# Altium PCB roverSwitch.PcbDoc (part 2 of 3)
Units mm, origin at the board's own origin, x right, y up, seen from the top; angles counter-clockwise.
Board outline 100 x 80 mm, 4 copper layers (Top Layer, Int1 (GND), Int2 (PWR), Bottom Layer), stack 1.585 mm thick; 262 components, 196 nets, 913 pads, 409 vias.
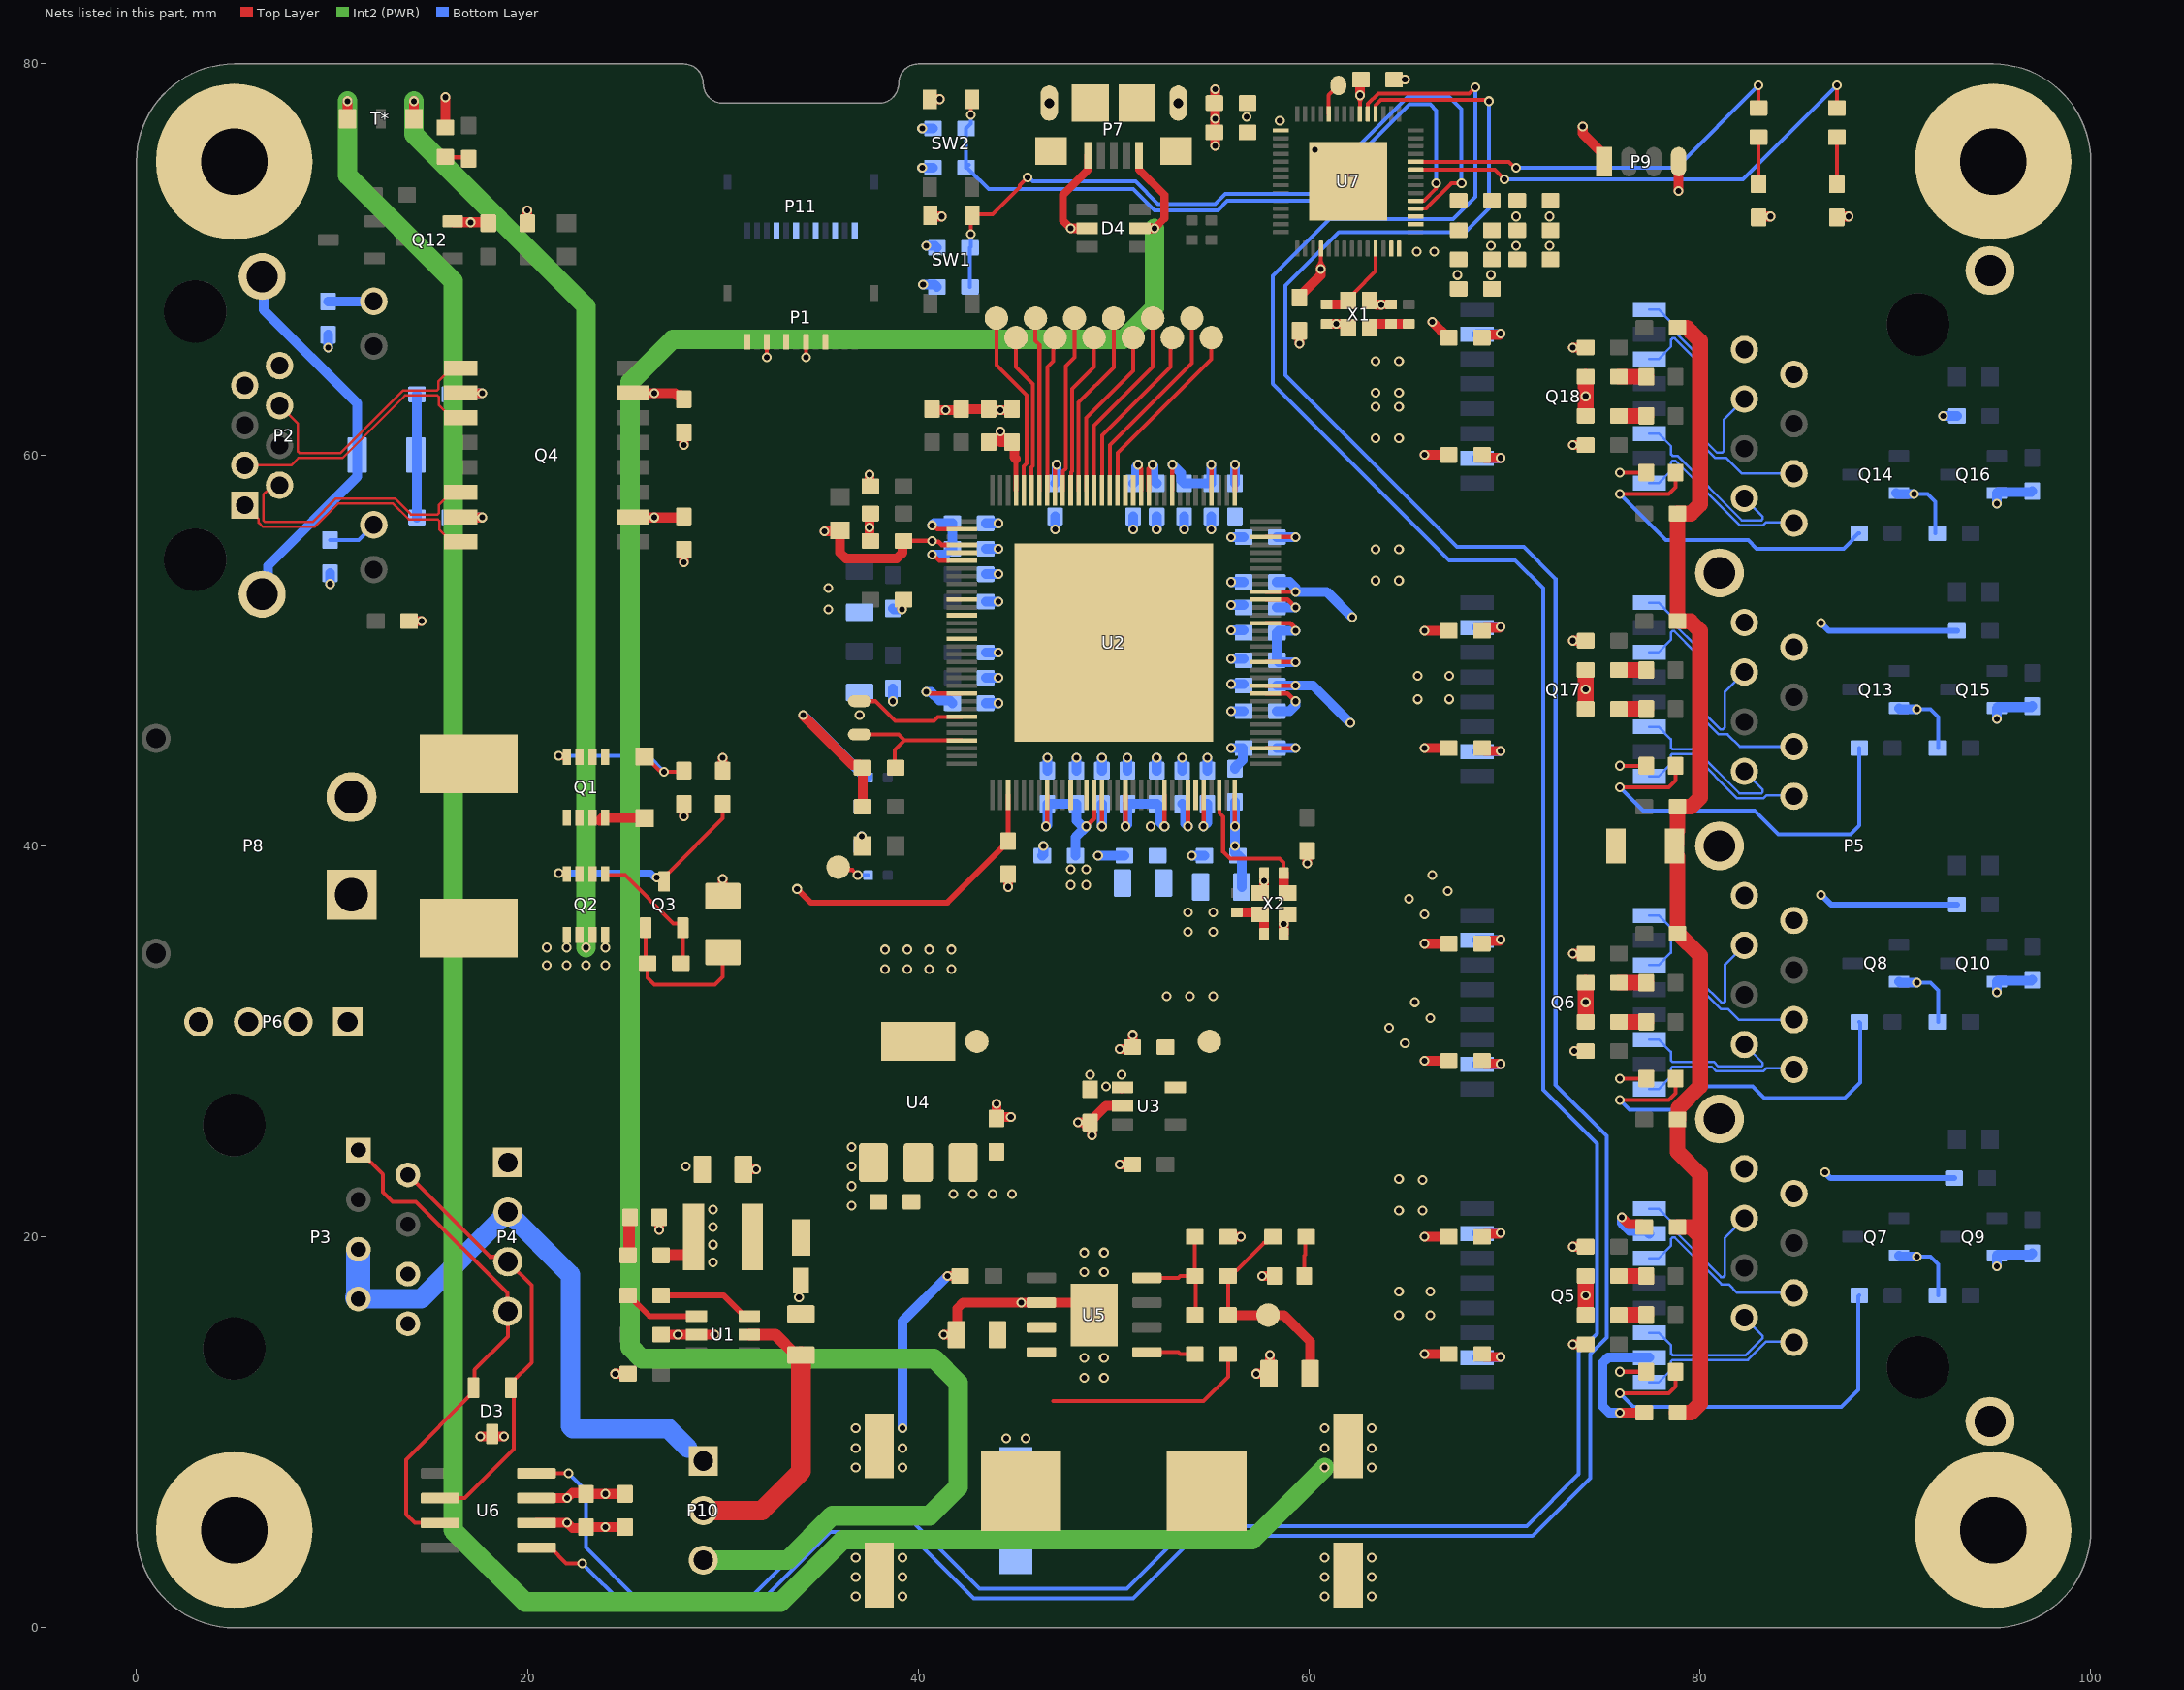
[diagram p4: the nets of this part, all layers, seen from the top]

## Part data
C1 C46: "10000 pF ±10% 25V Ceramic Capacitor X5R 0603 (1608 Metric)", Package / Case="Metric 1608 , EIA 0603", Supplier Part Number 1=478-KGM15AR51E103KTCT-ND, Volt=25V, Mounted=Yes, Precision=X5R-10%, Supplier 1=Digikey
C2: Package / Case="Metric 2012 , EIA 0805", Supplier Part Number 1=490-10515-1-ND, Volt=35V, Mounted=Yes, Precision=X5R-10%, Supplier 1=Digi-Key, Supplier 2=Digi-Key, Supplier 3=Digi-Key, Supplier 4=Digi-Key
C3: Package / Case="Metric 2012 , EIA 0805", Supplier Part Number 1=1276-6780-1-ND, Volt=16V, Mounted=Yes, Precision=X5R-10%, Supplier 1=Digi-Key, Supplier 2=Digi-Key, Supplier 3=Digi-Key, Supplier 4=Digi-Key
C4 C5 C7 C8 C9 C10 C11 C12 C13 C14 C15 C18 C19 C20 C21 C22 C23 C24 C25 C26 C27 C31 C32 C34 C36 C37 C41 C45 C48 C49 C50 C52 C53 C54 C55 C56 C57 C58 C59 C62 C63 C64 C65 C66 C67 C69 C70 C71 C72: Package / Case="Metric 1608, EIA 0603", Supplier Part Number 1=1276-1935-2-ND, Volt=50V, Mounted=Yes, Precision=X7R-10%, Supplier 1=Digi-Key, Supplier 2=Digi-Key, Supplier Part Number 2=1276-1934-2-ND
C6 C68: Package / Case="Metric 3216, EIA 1206", Supplier Part Number 1=399-C1206C102KGRAC7800CT-ND, Volt=2kV, Mounted=Yes, Precision=X7R-10%, Supplier 1=Digi-Key, Supplier 2=Digi-Key
C16 C28 C30 C60 C61: Package / Case="Metric 1608 , EIA 0603", Supplier Part Number 1=1276-1274-1-ND, Volt=10V, Mounted=Yes, Precision=20%, Supplier 1=Digikey
C17 C29 C74 C75 C85: "10 µF ±20% 10V Ceramic Capacitor X5R 0603 (1608 Metric)", Package / Case="Metric 1608 , EIA 0603", Supplier Part Number 1=4713-GMC10X5R106M10NTCT-ND, Volt=10V, Mounted=Yes, Precision=20%, Supplier 1=Digikey
C35 C42 C43 C44: Package / Case="0402 (1005 Metric)", Supplier Part Number 1=399-C0402C100K5GAC7867CT-ND, Volt=50V, HelpURL=https://connect.kemet.com:7667/gateway/IntelliData-ComponentDocumentation/1.0/download/datasheet/C0402C100K5GACTU, Mounted=Yes, Precision="C0G - 10%", Supplier 1=Digi-Key, Supplier 2=Digi-Key
C38 C40 C47 C51 C76 C77: Package / Case="Metric 1608, EIA 0603", Supplier Part Number 1=1276-1859-2-ND, Volt=25V, Mounted=Yes, Precision=X5R-10%, Supplier 1=Digi-Key, Supplier 2=Digi-Key, Supplier Part Number 2=1276-1942-2-ND
  C40: Supplier 3=Digi-Key, Supplier 4=Digi-Key
C39: "Capacitor-0603-10uF-6.3V-X5R, Low ESR, Low ESL", Package / Case="Metric 1608 , EIA 0603", Supplier Part Number 1=NMC0603X5R106M6.3TRP4KF, Volt=6.3V, Mounted=Yes, Precision=X5R-20%, Supplier 1="Arrow Electronics"
C78: Package / Case="Metric 1608 , EIA 0603", Supplier Part Number 1=490-4778-1-ND, Volt=50V, Mounted=Yes, Precision=X7R-10%, Supplier 1=Digikey
C79: library part Capacitor-100uF-50V-SMD, "CAP ALUM 100UF 20% 50V SMD", Supplier Part Number 1=1189-1651-1-ND, Volt=50V, Mounted=Yes, Precision=20%, Supplier 1=Digi-Key, Supplier 2=Digi-Key
C81 C83: Package / Case="Metric 2012 , EIA 0805", Supplier Part Number 1=490-12389-1-ND, Volt=25V, Mounted=Yes, Precision=X5R-20%, Supplier 1=Digi-Key, Supplier 2=Digi-Key
C82: Package / Case="Metric 1608, EIA 0603", Supplier Part Number 1=478-KGM15ACG1H820JTCT-ND, Volt=50V, Mounted=Yes, Precision=C0G-5%, Supplier 1=Digi-Key, Supplier 2=Digi-Key
C84: library part Capacitor-220uF-35V-SMD, Supplier Part Number 1=1189-1651-1-ND, Volt=35V, Mounted=Yes, Precision=20%, Supplier 1=Digi-Key, Supplier 2=Digi-Key
D1 D2: "Diode SCHOTTKY  30 V 100mA Surface Mount 0402/SOD-923F", Package / Case=0402/SOD-923F, Supplier Part Number 1=641-1271-1-ND, Volt=30, Mounted=Yes, Supplier 1=Digi-Key
D3: "55V Clamp 6A (8/20µs) Ipp Tvs Diode Surface Mount SOT-23", Package / Case=SOT-23-3, Supplier Part Number 1=5272-ESDCAN24-2BLYCT-ND, Volt=24, Mounted=Yes, Supplier 1=Digi-Key
D4: "4CH Clamp Ipp Tvs Diode Surface Mount SOT23-6 (SC74)", Package / Case=SOT23-6, Supplier Part Number 1=NUP4301MR6T1GOSTR-ND, Volt=70, Mounted=Yes, Supplier 1=Digi-Key
D5: "DIODE SCHOTTKY 40V 5A SMA", Package / Case=SMA, Supplier Part Number 1=641-1707-1-ND, Volt=40V, Mounted=Yes, Supplier 1=Digi-Key
DZ1: "Zener Diode 6.2 V 200 mW ±6% Surface Mount SOD-123", Package / Case=SOD-123, Supplier Part Number 1=BZT52C13-TPMSCT-ND, Volt=6.2V, Grade=None, Mounted=Yes, Precision=6%, Supplier 1=Digi-Key, Watt=200mW
DZ2: "Diode 30 V 1A Surface Mount MicroSMP (DO-219AD)", Package / Case="DO-214AC, SMA", Supplier Part Number 1=MSS1P3L-M3/89AGICT-ND, Volt=30V, Grade=None, Mounted=Yes, Supplier 1=Digi-Key
DZ3: "DIODE ZENER 27V 500MW SOD123", Package / Case=SOD-123, Supplier Part Number 1=MMSZ5254B-TPMSCT-ND, Volt=27V, Grade=None, Mounted=Yes, Precision=5%, Supplier 1=Digi-Key, Watt=0.5W
J1 J2 J3 J4 J5 J6 J7 J8 J9 J10 J11 J12 J13 J14 J15 J20 J21 J22 J23: library part "PAD 0.53mm AWG28-Solid", "PAD for 28 AWG Solid Wire", Mounted=N/A
J16 J17 J18 J19: library part "Hole 3.40mm M3-Eyelet", "Hole for M3 Bolt with 8mm pad", Mounted=N/A
L1: "10 µH Shielded Drum Core, Wirewound Inductor 1.5 A 100mOhm Nonstandard", Current=1.5A, Package / Case=SMD, Supplier Part Number 1=535-12314-2-ND, Mounted=Yes, Precision=20%, Supplier 1=Digi-Key
L2 L3 L5 L6: "180 Ohms @ 100 MHz 1 Power Line Ferrite Bead 0805 (2012 Metric) 4A 20mOhm", Current=4A, Package / Case=SMD, Supplier Part Number 1=4816-HFZ2012PF-181T40CT-ND, Mounted=Yes, Supplier 1=Digi-Key
L4: "60 Ohms @ 100 MHz 1 Signal Line Ferrite Bead 0603 (1608 Metric) 3A 40mOhm", Current=3A, Package / Case=SMD, Supplier Part Number 1=1934-1396-1-ND, Mounted=Yes, Supplier 1=Digi-Key
L7: "2 A 277 V AC 250 V DC Fuse Board Mount (Cartridge Style Excluded) Requires Holder, Surface Mount 2-SMD, Square End Block with Clip", Current=2A, Package / Case=SMD, Supplier Part Number 1=486-2091-ND, Mounted=Yes, Supplier 1=Digi-Key
L8: "FIXED IND 22UH 5A 66 MOHM SMD", Current=5A, Package / Case=SMD, Supplier Part Number 1=308-2498-1-ND, Mounted=Yes, Precision=20%, Supplier 1=Digi-Key
LED1 LED5 LED6 LED17: "LED RED CLEAR 1608 SMD", Package / Case="0603 (1608 Metric)", Supplier Part Number 1=3147-B1911USD-20D000114U1930CT-ND, Mounted=Yes, Supplier 1=Digi-Key
LED2 LED3 LED4 LED7 LED8 LED9 LED10 LED11 LED12 LED13 LED14 LED15 LED16: "LED RED CLEAR 0603 SMD", Package / Case="0603 (1608 Metric)", Supplier Part Number 1=3147-B1911USD-20D000114U1930CT-ND, Mounted=Yes, Supplier 1=Digi-Key
P1 P11: library part FFC-12P-0.5MM-R/A, "CONN FFC FPC 12POS 0.5MM R/A", Package / Case=SMD, Supplier Part Number 1=609-F3311A7H121012E200CT-ND, Volt=50V, Mounted=Yes, Supplier 1=Digi-Key
P2: "Jack Modular Connector 8p8c (RJ45, Ethernet) 90° Angle (Right) Shielded with LEDs", Package / Case=SMD, Supplier Part Number 1=2057-MTJ-88ARX1-FSM-LG-ND, Volt=N/A, HelpURL=https://app.adam-tech.com/products/download/data_sheet/203879/mtj-88arx1-fsm-lg-data-sheet.pdf, Mounted=Yes, Supplier 1=Digikey
P3: library part RJ545, "Jack Modular Connector 8p8c (RJ45, Ethernet) 90° Angle (Right) Unshielded Cat3", Package / Case=SMD, Supplier Part Number 1=609-1046-ND, Volt=N/A, HelpURL=https://cdn.amphenol-cs.com/media/wysiwyg/files/drawing/c-bmj-0102.pdf, Mounted=Yes, Supplier 1=Digikey
P4 P6: "4pos TH 2.54mm Header", Package / Case=TH, Supplier Part Number 1=N/A, Mounted=Yes, Supplier 1=Digi-Key, Volt=N/A
P5: library part RJ45-4Ports, "Jack Modular Connector 8p8c (RJ45, Ethernet) 90° Angle (Right) Shielded Cat5", Package / Case=TH, Supplier Part Number 1=151-1120-ND, Volt=N/A, HelpURL=https://mm.digikey.com/Volume0/opasdata/d220001/medias/docus/971/A00-432-262-450.pdf, Mounted=Yes, Supplier 1=Digikey
P7: library part USB-Micro, "USB - micro B USB 2.0 Receptacle Connector 5 Position Surface Mount, Right Angle; Through Hole", Package / Case=SMD, Supplier Part Number 1=609-4616-2-ND, Volt=N/A, Mounted=Yes, Supplier 1=Digikey
P8: library part XT30_pcb, Package / Case=TH, Volt=N/A, Mounted=Yes, Supplier 1=Digi-Key
P9: "4pos SMD 1.27mm", Package / Case=TH, Supplier Part Number 1=N/A, Mounted=Yes, Supplier 1=Digi-Key, Volt=N/A
P10: "3pos TH 2.54mm Header", Package / Case=TH, Supplier Part Number 1=N/A, Mounted=Yes, Supplier 1=Digi-Key, Volt=N/A
Q1 Q2: "MOSFET P-CH 30V 24A 8DFN", Current=24A, Package / Case="8-DFN-EP (3x3)", Supplier Part Number 1=785-1796-2-ND, Volt=30V, Mounted=Yes, Supplier 1=Digi-Key
Q3 Q7 Q8 Q11 Q13 Q14: "P-Channel 30 V 6A (Ta) 1W (Ta) Surface Mount SOT-23F", Current=6A, Package / Case=SOT-523, Supplier Part Number 1=SSM3J332RLFCT-ND, Volt=30V, Mounted=Yes, Supplier 1=Digi-Key
Q4 Q5 Q6 Q17 Q18: "350µH LAN 10/100 Base-T Pulse Transformer 1CT:1CT Surface Mount", Supplier Part Number 1=PT61017PELCT-ND, Mounted=Yes, Supplier 1=Digi-Key
Q9 Q10 Q12 Q15 Q16: "N-Channel 30 V 4A (Ta) 1.4W (Ta) Surface Mount SOT-23-3", Current=4A, Package / Case=SOT-23-3, Supplier Part Number 1=DMG3402L-7DICT-ND, Volt=30V, Mounted=Yes, Supplier 1=Digi-Key
R1 R6 R7 R38 R39 R51: library part Resistor0603-10k, "Resistor0603-10k", Package / Case="Metric 1608, EIA 0603", Supplier Part Number 1=311-10.0KHRTR-ND, Mounted=Yes, Precision=1%, Supplier 1=Digi-Key, Supplier 2=Digi-Key, Supplier 3=Digi-Key, Supplier 4=Digi-Key, Supplier Part Number 2=RMCF0603FT10K0TR-ND, Watt=0.1W
R2 R3 R33 R34 R35 R36 R45 R46 R47 R48: library part Resistor-0603-75R, "Resistor0603-75R", Package / Case="Metric 1608, EIA 0603", Supplier Part Number 1=311-75.0HRCT-ND, Mounted=Yes, Precision=1%, Supplier 1=Digi-Key, Watt=0.1W
R4 R5 R8 R27 R28 R29 R32 R37 R40 R41 R42 R43 R44 R75: library part Resistor-0603-1k, "Resistor0603-1k", Package / Case="Metric 1608, EIA 0603", Supplier Part Number 1=311-1.00KHRCT-ND, Mounted=Yes, Precision=1%, Supplier 1=Digi-Key, Watt=0.1W
R9 R10 R11 R12 R22 R23 R24 R52 R55 R56 R57 R58 R59 R60 R61 R62 R63 R64 R65 R66 R67 R68 R69 R70 R71 R72 R73 R74: library part Resistor-0603-10k, "Resistor0603-10k", Package / Case="Metric 1608, EIA 0603", Supplier Part Number 1=311-10.0KHRTR-ND, Mounted=Yes, Precision=1%, Supplier 1=Digi-Key, Watt=0.1W
R13 R14 R15 R16 R17 R19 R20 R21: library part Resistor-0603-750R, "Resistor0603-750R", Package / Case="Metric 1608, EIA 0603", Supplier Part Number 1=311-750HRCT-ND, Mounted=Yes, Precision=1%, Supplier 1=Digi-Key, Watt=0.1W
R18: library part Resistor-0603-191R, "Resistor-0603-191R", Package / Case="Metric 1608, EIA 0603", Supplier Part Number 1=311-191HRCT-ND, Mounted=Yes, Precision=1%, Supplier 1=Digi-Key, Watt=0.1W
R25: library part Resistor-0402-0R, "Resistor-0402-0R", Package / Case="Metric 1005, EIA 0402", Supplier Part Number 1=311-100LRCT-ND, Mounted=Yes, Precision=1%, Supplier 1=Digi-Key, Watt=1/16W
R26: library part Resistor-0603-6.04k, "Resistor-0603-6.04k", Package / Case="Metric 1608, EIA 0603", Supplier Part Number 1=311-6.04KHRCT-ND, Mounted=Yes, Precision=1%, Supplier 1=Digi-Key, Watt=0.1W
R49 R53: library part Resistor-0603-100k, "Resistor0603-100k", Package / Case="Metric 1608, EIA 0603", Supplier Part Number 1=311-100KHRCT-ND, Mounted=Yes, Precision=1%, Supplier 1=Digi-Key, Watt=0.1W
R50: library part Resistor-0603-32.4k, "Resistor0603-32.4k", Package / Case="Metric 1608, EIA 0603", Supplier Part Number 1=311-32.4KHRCT-ND, Mounted=Yes, Precision=1%, Supplier 1=Digi-Key, Watt=0.1W
R54: library part Resistor-0603-8.87k, "Resistor0603-8.87k", Package / Case="Metric 1608, EIA 0603", Supplier Part Number 1=311-8.87KHRCT-ND, Mounted=Yes, Precision=1%, Supplier 1=Digi-Key, Watt=0.1W
SW1 SW2: "TACT 4.2 X 3.2, 2.5 MM H, 180GF,", Current=0.05A, Supplier Part Number 1=CKN12215-1-ND, Volt=12V, Mounted=Yes, Supplier 1=Digi-Key
T2: library part NetTie_0603_Short
U1: library part REG_SWR_RT8258GJ6, "Switching Regulator/Controller", Manufacturer=Richtek, Supplier Part Number=835-RT8258GJ6, Category="Voltage Regulators - Switching", ComponentLink1Description=https://datasheet.ciiva.com:443/pdfs/VipMasterIC/IC/RHTK/RHTKS00677/RHTKS00677-1.pdf?src-supplier=IHS+Markit, ComponentLink1URL=https://datasheet.ciiva.com:443/pdfs/VipMasterIC/IC/RHTK/RHTKS00677/RHTKS00677-1.pdf?src-supplier=IHS+Markit, ComponentLink2Description=https://datasheet.ciiva.com/2035/3d3futf-83fb3frfm4mju4ltaylnbkzg3d3d3f3d-2035878.pdf?src-supplier=Digikey, ComponentLink2URL=https://datasheet.ciiva.com/2035/3d3futf-83fb3frfm4mju4ltaylnbkzg3d3d3f3d-2035878.pdf?src-supplier=Digikey, ComponentLink3Description=https://datasheet.ciiva.com/22686/1720507-22686356.pdf?src-supplier=Element14, ComponentLink3URL=https://datasheet.ciiva.com/22686/1720507-22686356.pdf?src-supplier=Element14, Manufacturer Part Number=RT8258GJ6, Pricing="1=0,64, 10=0,566, 50=0,566, 100=0,434, 1000=0,274, 10000=0,223 (USD)", RoHS=Yes, Stock=6840, Supplier=Mouser
U2: "IC ETHERNET SWITCH 7PORT 128TQFP", Package / Case=128TQFP, Supplier Part Number 1=KSZ8567STXI-CT-ND, HelpURL=https://ww1.microchip.com/downloads/aemDocuments/documents/OTH/ProductDocuments/DataSheets/KSZ8567S-Data-Sheet-DS00002391C.pdf, Mounted=Yes, Supplier 1=Digikey
U3: "IC REG 2.5V Positive Fixed 1 Output 1A SOT-23-5", Package / Case=SOT23-5, Supplier Part Number 1=296-50412-1-ND, Mounted=Yes, Supplier 1=Digi-Key
U4: "IC REG 1.2V LINEAR 1A SOT223", Package / Case=SOT223, Supplier Part Number 1=296-TLV1117LV12DCYRCT-ND, Mounted=Yes, Supplier 1=Digi-Key
U5: "5A Buck Switching Regulator IC Positive Adjustable 1.222V 1 Output 5A 8-SOIC (0.154\", 3.90mm Width) Exposed Pad", Package / Case=8-SOIC-EP, Supplier Part Number 1=1028-RT6285GSPCT-ND, Grade=None, HelpURL=file:///C:/Users/Emile/Downloads/DS6285-00.pdf, Mounted=Yes, Supplier 1=Digi-Key
U6: "1/1 Transceiver Half CANbus 8-SOIC", Package / Case=8-SOIC, Supplier Part Number 1=296-26344-1-ND, HelpURL=https://www.ti.com/lit/ds/symlink/sn65hvd230.pdf?HQS=dis-dk-null-digikeymode-dsf-pf-null-wwe&ts=1723930967656&ref_url=https%253A%252F%252Fwww.ti.com%252Fgeneral%252Fdocs%252Fsuppproductinfo.tsp%253FdistId%253D10%2526gotoUrl%253Dhttps%253A%252F%252Fwww.ti.com%252Flit%252Fgpn%252Fsn65hvd230, Mounted=Yes, Supplier 1=Digikey
U7: "IC RF TxRx + MCU Bluetooth, WiFi 802.11b/g/n, Bluetooth v5.0 2.412GHz ~ 2.484GHz 56-VFQFN Exposed Pad", Package="56-VFQFN Exposed Pad", Supplier Part Number 1=1965-ESP32-S3FN8-ND, Availability="In Stock", DigiKey Link=https://www.digikey.ca/en/products/detail/espressif-systems/ESP32-S3FN8/15822446, HelpURL=https://www.espressif.com/sites/default/files/documentation/esp32-s3_datasheet_en.pdf, MF="Espressif Systems", MP=ESP32-S3FN8, Supplier 1=Digikey
X1: "40 MHz ±10ppm Crystal 8pF 50 Ohms 4-SMD, No Lead", Supplier Part Number 1=478-CX2016DB40000D0FLJCCCT-ND, Supplier 1=Digikey
X2: "25 MHz ±30ppm Crystal 20pF 50 Ohms 4-SMD, No Lead", Supplier Part Number 1=FL2500123ZCT-ND, HelpURL=https://www.diodes.com/assets/Datasheets/FL.pdf, Supplier 1=Digikey

## Via types
v1: diameter 0.5, hole 0.3, Top Layer to Bottom Layer, tented both sides, 409 vias

## Nets (pads, with @x,y where several pads share a name; then routed paths per layer and width w, separated by ;. In a path a pad name is that pad's centre, name@x,y a point inside that pad or via, vN(x,y) a via of type N, cw(c..) or ccw(c..) an arc to the next point about the centre after c; other vN are vias at no path point)
1V2: C7.2 C8.2 C9.2 C10.2 C11.2 C12.2 C13.2 C14.2 C15.2 C16.2 C77.2 J21.1 L5.1 L6.1 U2.11 U2.23 U2.45 U2.56 U2.66 U2.70 U2.87 U2.104 U2.110 U4.2 U4.4 | length 36
  Top Layer w0.23: v1(40.417,47.875) 40.469,47.823 40.602,47.823 40.625,47.8 U2.87@42.221,47.8 ; v1@40.673,54.9 v1(40.7,54.9) 40.773,54.9 41.077,54.596 41.484,54.596 41.487,54.599 U2.70@41.555,54.599 ; v1(40.7,56.4) 40.773,56.4 40.973,56.2 U2.66@42.221,56.2 ; v1(46.525,41) 46.525,41.073 46.6,41.148 U2.104@46.6,42.621 ; U2.56@47,58.179 47,59.352 47.075,59.427 v1(47.075,59.5) ; v1(48.6,41) 49,41.4 U2.110@49,42.621 ; v1@51.251,59.476 51.251,59.449 51.4,59.3 U2.45@51.4,58.179 ; U2.11@57.779,48.2 v1(59.3,48.2) ; U2.23@57.779,53 v1(59.3,53)
  Bottom Layer w0.5: v1(40.417,47.875) 40.651,47.875 41.076,47.45 41.6,47.45 C14.2@41.75,47.3 ; v1(40.7,56.4) 40.8,56.5 C10.2@41.75,56.5 41.75,55.25 C11.2@41.7,55.2 ; v1@40.702,54.902 41.402,54.902 C11.2@41.7,55.2 ; C11.2@41.75,55.2 C11.2@41.7,55.2 ; v1(46.525,41) 46.6,41.075 C12.2@46.6,42.15 C13.2@48.1,42.15 48.1,41.3 48.4,41 v1(48.6,41) 48.05,40.45 C15.2@48.05,39.5 ; C9.2@47,58.55 47.075,58.625 v1(47.075,59.5) ; C8.2@51,58.55 51.15,58.7 51.15,59.399 v1(51.251,59.5) ; C16.2@58.35,48.2 v1(59.3,48.2) 60.2,48.2 v1(62.1,46.3) ; C7.2@58.35,53.5 59.007,53.5 59.3,53.207 v1(59.3,53) 60.9,53 v1(62.2,51.7)
  other v1: 38.3,33.7 39.433,33.7 40.567,33.7 41.7,33.7 38.3,34.7 39.433,34.7 40.567,34.7 41.7,34.7 47.8,38 48.6,38 47.8,38.8 48.6,38.8 37,46.7
2V5: C75.1 J20.1 L2.1 L3.1 U3.5
  other v1: 52.7,32.3 53.9,32.3 55.1,32.3 53.8,35.6 55.1,35.6 53.8,36.6 55.1,36.6 35.4,52.1 35.4,53.2
3V3: C3.2 C17.2 C18.2 C19.2 C20.2 C34.2 C37.2 C38.2 C39.2 C46.2 C47.2 C48.2 C49.2 C50.2 C51.2 C74.1 C76.2 C85.2 D1.2 L1.2 L4.2 P9.1 R4.2 R5.1 R8.1 R22.2 R23.2 R24.2 R27.2 R28.2 R29.2 R32.2 R37.2 R38.2 R39.2 R42.2 R43.2 R44.2 R49.2 R51.2 R55.2 R57.2 R63.2 R67.2 R69.2 T2.1 U2.61 U2.68 U2.99 U3.1 U4.3 U6.3 U7.20 U7.29 U7.46 U7.55 U7.56 | length 86.1
  Top Layer w0.2: 60.6,69.8 U7.46@60.6,70.555 ; U7.20@62.6,77.445 v1@62.6,78.2
  Top Layer w0.23: C19.2@39.25,55.6 39.251,55.601 v1(40.7,55.602) v1(40.7,55.602) 40.752,55.551 41.046,55.551 41.197,55.4 U2.68@41.555,55.4 ; C20.2@44.6,40.25 U2.99@44.6,42.621 ; U2.61@45,58.179 45,59.8
  Top Layer w0.3: v1@33.816,37.806 33.816,37.784 33.9,37.7 34.5,37.1 41.493,37.1 44.343,39.95 44.35,39.95 44.6,40.2 C20.2@44.6,40.25 ; v1@60.6,69.7 60.6,69.8 ; v1@62.6,78.2 v1(62.6,78.4)
  Top Layer w0.35: v1@60.6,69.6 v1@60.6,69.7
  Top Layer w0.5: R63.2@20,71.85 v1(20,72.5) ; U6.3@20.464,6.635 v1(22.035,6.635) 22.3,6.9 22.95,6.9 C85.2@23,6.85 C34.2@25,6.85 ; v1(24.5,13) R49.2@25.15,13 ; v1(34.1,46.7) 34.1,46.68 36.63,44.15 37,44.15 R22.2@37.15,44 R24.2@37.15,42 ; v1(35.2,56.1) T2.1@35.95,56.1 ; T2.1@36,56.1 36,55 36.3,54.7 38.9,54.7 39.2,55 39.2,55.55 C19.2@39.25,55.6 ; v1(44.2,61.2) 44.2,60.65 C18.2@44.8,60.65 44.8,60.563 44.913,60.45 44.913,59.887 45,59.8 ; C74.1@48.85,27.65 C74.1@48.9,27.6 ; v1(50.3,23.7) R51.2@50.95,23.7 ; U3.1@50.408,27.608 U3.1@50.45,27.65 ; C49.2@59.4,68 60.317,68.917 60.6,69.2 v1@60.6,69.6 ; v1(62.6,78.4) C48.2@62.6,79.2 ; v1(74,76.8) 74,76.445 75.095,75.35 P9.1@75.095,75
  Top Layer w0.6: R4.2@26.85,19.055 28.055,19.055 L1.2@28.1,19.1
  Top Layer w0.8: R28.2@74.15,16 R27.2@74.15,18 ; R32.2@74.15,31 R29.2@74.15,33 ; R42.2@74.15,47 R37.2@74.15,49 ; R43.2@74.15,62 R44.2@74.15,64
  Bottom Layer w0.3: v1(86.2,37.5) 86.7,37 R57.2@93.15,37 ; v1(86.2,51.4) 86.6,51 R67.2@93.15,51 ; v1@86.4,23.273 86.403,23.273 86.676,23 R55.2@93,23
  Bottom Layer w0.5: v1(9.8,65.5) R8.1@9.8,66.15 ; v1(9.9,53.4) R5.1@9.9,53.95 ; v1(34.1,46.7) 37.3,43.5 D1.2@37.4,43.5 ; R23.2@37.15,42 37.15,43.35 ; D1.2@37.35,43.55 D1.2@37.4,43.6 ; v1(40.2,76.7) R39.2@40.75,76.7 ; v1(40.4,70.7) 40.85,70.7 R38.2@40.95,70.6 ; v1(92.45,62) R69.2@93.15,62
  other v1: 24,6.85 74.15,17 29.5,18.7 29.5,19.6 29.5,20.5 29.5,21.4 41.8,22.2 42.8,22.2 43.8,22.2 44.8,22.2 86.4,23.3 28.1,23.6 49.6,27.7 48.8,28.3 50.4,28.3 74.15,32 33.8,37.8 74.15,48 74.15,63 67.6,69.2 60.6,69.5 65.5,70.4 66.4,70.4 70.6,70.7 70.6,72.2 58.5,77.1 56.8,77.3
5V_USB: D4.5 P7.1 P10.3 | length 124.5
  Top Layer w0.4: P7.1@51.3,75.325 51.3,74.6 52.6,73.3 52.6,72.1 v1(52.1,71.6)
  Top Layer w0.5: D4.5@51.35,71.6 v1(52.1,71.6)
  Int2 (PWR) w1: P10.3@29,3.46 33.315,3.46 35.59,5.735 40.575,5.735 42.04,7.199 42.04,12.543 40.81,13.773 25.844,13.773 25.259,14.358 25.259,63.73 27.439,65.911 50.496,65.911 52.095,67.509 v1@52.095,71.595
12V: C82.2 C83.2 C84.1 J22.1 L8.2 Q7.2 Q8.2 Q13.2 Q14.2 R53.2 R56.2 R58.2 R68.2 R70.2 R75.2 T*.1 | length 151.9
  Top Layer w0.2: C82.2@55.7,17.9 55.85,17.75 R53.2@55.85,16 ; C82.2@55.85,18 56.15,18.3 56.308,18.3 57.708,19.7 57.85,19.7 R75.2@58.15,20
  Top Layer w0.5: T*.1@10.8,77.4 v1(10.8,78.1) ; R53.2@55.7,16 R53.2@55.85,16 J22.1@57.9,16 58.7,16 60.05,14.65 C83.2@60.05,13
  Int2 (PWR) w1: v1(10.8,78.1) 10.8,74.3 16.2,68.9 16.2,5 19.878,1.322 32.968,1.322 36.152,4.506 57.102,4.506 v1(60.8,8.204)
  Bottom Layer w0.2: v1(90.95,58) 91.65,58 92.05,57.6 R70.2@92.05,56 ; v1(91.1,19) 91.8,19 92.2,18.6 R56.2@92.2,17 ; v1(91.1,33) 91.8,33 92.2,32.6 R58.2@92.2,31 ; v1(91.1,47) 91.8,47 92.2,46.6 R68.2@92.2,45
  Bottom Layer w0.5: Q14.2@90.035,58.05 90.085,58 v1(90.95,58) ; Q7.2@90.185,19.05 90.235,19 v1(91.1,19) ; Q8.2@90.185,33.05 90.235,33 v1(91.1,33) ; Q13.2@90.185,47.05 90.235,47 v1(91.1,47)
  other v1: 63.2,8.204 60.8,9.204 63.2,9.204 60.8,10.204 63.2,10.204
24V: C79.1 C81.2 P3.5 P3.7 P4.2 P10.1 Q2.5 Q2.6 Q2.7 Q2.8 R52.2 T*.2 U5.7 | length 89.2
  Top Layer w0.5: T*.2@14.2,77.1 T*.2@14.2,77.2 v1(14.2,78.1) ; v1(41.5,18) R52.2@42.15,18
  Int2 (PWR) w1: v1(14.2,78.1) 14.2,76.4 23,67.6 v1(23,34.8)
  Bottom Layer w0.2: 22.2,10.317 22.317,10.2 ; 28.21,9.19 28.35,9.19 28.917,8.623 P10.1@28.917,8.483
  Bottom Layer w0.5: v1(39.2,10.204) 39.2,15.7 v1(41.5,18)
  Bottom Layer w1: P3.7@11.35,16.825 14.555,16.825 P4.2@19,21.27 22.2,18.07 22.2,10.317 ; 22.317,10.2 27.2,10.2 28.21,9.19
  Bottom Layer w1.25: P3.7@11.3,16.9 11.347,16.947 11.347,19.362 P3.5@11.35,19.365
  other v1: 36.8,8.204 39.2,8.204 36.8,9.204 39.2,9.204 36.8,10.204 21,33.9 22,33.9 23,33.9 24,33.9 21,34.8 22,34.8 24,34.8
24V_RAW: L7.1 P6.3 P6.4 P8.P
AVDDH: C21.2 C22.2 C23.2 C24.2 C25.2 C26.2 C27.2 C28.2 L2.2 U2.10 U2.22 U2.33 U2.44 U2.111 U2.122 U2.128 | length 21.9
  Top Layer w0.23: v1@49.4,40.9 U2.111@49.4,42.621 ; v1(53.8,41) U2.122@53.8,42.621 ; v1@56.2,41.2 U2.128@56.2,42.621 ; U2.10@57.779,47.8 58.9,47.8 v1(59.3,47.4) ; U2.22@57.779,52.6 58.9,52.6 v1(59.3,52.2)
  Top Layer w0.25: U2.44@51.8,58.179 51.8,59.3 v1(52,59.5) ; v1@53.8,40.9 v1(53.8,41) ; U2.33@56.2,58.179 v1@56.2,59.3 ; v1@59.3,47.388 v1(59.3,47.4)
  Bottom Layer w0.5: v1(49.4,41) C23.2@49.4,42.15 ; v1(52,59.5) 52.05,59.45 52.05,58.7 C24.2@52.2,58.55 ; C22.2@53.5,42.15 53.65,42 53.65,41.15 v1(53.8,41) ; C21.2@56.2,42.25 v1(56.2,41) 56.2,39.65 C28.2@56.35,39.5 56.4,39.5 56.55,39.35 L2.2@56.55,37.9 ; C25.2@56.2,58.55 v1(56.2,59.5) ; C27.2@58.35,46.9 59.007,46.9 59.3,47.193 v1(59.3,47.4) ; C26.2@58.35,52.2 v1(59.3,52.2)
  other v1: 56.2,40
AVDDL: C45.2 C52.2 C53.2 C54.2 C55.2 C56.2 C57.2 C58.2 C59.2 C60.2 L5.2 U2.3 U2.14 U2.19 U2.30 U2.36 U2.41 U2.114 U2.119 U2.124 | length 27.3
  Top Layer w0.23: v1(50.6,41) U2.114@50.6,42.621 ; v1(52.6,41) U2.119@52.6,42.621 ; U2.41@53,58.179 v1@53,59.3 ; v1@54.6,40.9 U2.124@54.6,42.621 ; U2.36@55,58.179 v1@55,59.4 ; U2.3@57.779,45 v1@59.2,45 ; U2.14@57.779,49.4 v1@59.2,49.4 ; U2.19@57.779,51.4 59.049,51.4 59.248,51.201 59.248,51.052 v1(59.3,51) ; U2.30@57.779,55.8 v1@59.1,55.8
  Bottom Layer w0.5: v1(50.6,41) 50.7,41.1 C56.2@50.7,42.15 C57.2@52.2,42.15 52.35,42 52.35,41.25 v1(52.6,41) ; v1(53,59.5) 53.3,59.2 53.307,59.2 53.45,59.057 53.45,58.7 C55.2@53.6,58.55 C54.2@55,58.55 v1(55,59.5) ; v1(54.6,41) 54.8,41.2 C58.2@54.8,42.15 ; C60.2@58.35,45 v1(59.3,45) ; C53.2@58.35,55.8 v1(59.3,55.8) ; v1(59.3,49.4) 58.45,49.4 C45.2@58.35,49.5 C52.2@58.35,50.9 58.45,51 v1(59.3,51)
  other v1: 51.9,41
CAN_H: D3.2 P3.1 P4.4 U6.7 | length 26.1
  Top Layer w0.2: P3.1@11.35,24.445 12.6,23.195 12.6,22.3 13.1,21.8 14.3,21.8 18.977,17.123 18.977,16.423 P4.4@19.1,16.3 ; U6.7@15.536,5.365 14.235,5.365 13.8,5.8 13.8,8.61 17.2,12.01 D3.2@17.2,12.2 ; D3.2@17.3,12.56 17.3,13.2 19,14.9 P4.4@19,16.19
CAN_L: D3.1 P3.2 P4.3 U6.6 | length 22.4
  Top Layer w0.2: P3.2@13.89,23.175 18.086,18.979 18.721,18.979 P4.3@19,18.7 ; U6.6@15.536,6.635 16.8,6.635 19.3,9.135 19.3,12.135 D3.1@19.15,12.285 ; P4.3@19,18.73 20.212,17.518 20.212,13.572 19.2,12.56 D3.1@19.2,12.2
CAN_RX: U6.4 U7.19 | length 157.7
  Top Layer w0.2: U6.4@20.3,7.9 20.303,7.903 22.097,7.903 v1(22.1,7.9) ; U7.19@63,77.445 63.01,77.455 63.01,77.96 63.542,78.492 68.192,78.492 v1(68.5,78.8)
  Bottom Layer w0.2: v1(22.1,7.9) 23,7 23,4.102 25.512,1.59 31.465,1.59 35.259,5.384 39.756,5.384 43.132,2.008 50.676,2.008 53.881,5.213 71.138,5.213 73.793,7.868 73.793,14.111 74.741,15.059 74.741,24.759 71.982,27.518 71.982,53.179 70.548,54.613 67.179,54.613 58.15,63.643 58.15,69.167 61.038,72.055 67.358,72.055 68.5,73.198 v1(68.5,78.8)
CAN_TX: U6.1 U7.18 | length 154.7
  Top Layer w0.2: U6.1@20.5,4.1 21.183,4.1 21.983,3.3 v1(22.8,3.3) ; U7.18@63.4,77.445 63.41,77.455 63.41,77.9 63.666,78.156 69.144,78.156 v1(69.2,78.1)
  Bottom Layer w0.2: v1(22.8,3.3) 25,1.1 31.7,1.1 35.5,4.9 39.449,4.9 42.849,1.5 51,1.5 54.2,4.7 71.422,4.7 74.379,7.657 74.379,14.003 75.218,14.842 75.218,25.168 72.612,27.774 72.612,53.668 70.98,55.3 67.569,55.3 58.784,64.085 58.784,68.655 61.526,71.397 67.997,71.397 69.2,72.6 v1(69.2,78.1)
EN: C40.2 R38.1 SW1.1 U7.4 | length 39.3
  Top Layer w0.2: v1(42.7,71.3) 42.7,72.175 SW1.1@42.775,72.25 ; SW1.1@42.8,72.3 43.8,72.3 45.19,73.69 45.19,73.79 v1(45.6,74.2) ; U7.4@65.445,72.6 65.455,72.61 65.99,72.61 67.28,73.9 v1(67.8,73.9)
  Bottom Layer w0.2: C40.2@42.65,68.6 R38.1@42.65,70.55 ; R38.1@42.65,70.6 42.7,70.65 v1(42.7,71.3) ; v1(45.6,74.2) 45.667,74.2 45.867,74 51.113,74 52.269,72.843 55.2,72.843 55.7,73.344 60.056,73.344 65.059,78.347 67.153,78.347 67.8,77.7 v1(67.8,73.9)
ETH_RX_1_N: P5.A6 Q5.9 | length 8.8
  Bottom Layer w0.125: Q5.9@77.407,21.445 77.877,21.445 78.516,20.806 78.516,20.513 81.081,17.948 81.185,17.948 81.258,18.021 81.258,19.938 P5.A6@82.27,20.95
ETH_RX_1_P: P5.A3 Q5.11 | length 9.2
  Bottom Layer w0.125: Q5.11@77.407,18.905 77.877,18.905 78.523,19.552 78.523,19.897 78.597,19.971 78.701,19.971 81.103,17.568 81.472,17.568 81.9,17.14 P5.A3@84.81,17.14
ETH_RX_2_N: P5.B6 Q6.9 | length 9.8
  Bottom Layer w0.125: Q6.9@77.407,36.445 77.877,36.445 80.048,34.274 80.048,33.036 81.102,31.982 81.206,31.982 81.279,32.055 81.279,33.929 P5.B6@82.27,34.92
ETH_RX_2_P: P5.B3 Q6.11 | length 10.8
  Bottom Layer w0.125: Q6.11@77.407,33.905 77.877,33.905 78.509,34.537 78.509,35.205 78.582,35.279 78.686,35.279 79.796,34.169 79.796,32.931 81.082,31.645 81.445,31.645 81.98,31.11 P5.B3@84.81,31.11
ETH_RX_3_N: P5.C6 Q17.9 | length 11.8
  Bottom Layer w0.125: Q17.9@77.407,52.445 77.877,52.445 78.513,51.809 78.513,51.516 80.048,49.981 80.048,46.964 81.054,45.958 81.158,45.958 81.271,46.071 81.271,47.891 P5.C6@82.27,48.89
ETH_RX_3_P: P5.C3 Q17.11 | length 12.3
  Bottom Layer w0.125: Q17.11@77.407,49.905 77.877,49.905 78.509,50.538 78.509,50.911 78.583,50.985 78.687,50.985 79.796,49.876 79.796,46.86 80.95,45.706 81.414,45.706 82.04,45.08 P5.C3@84.81,45.08
ETH_RX_4_N: P5.D6 Q18.9 | length 12.5
  Bottom Layer w0.125: Q18.9@77.407,67.445 77.877,67.445 78.51,66.812 78.51,66.519 80.048,64.981 80.048,60.934 80.869,60.113 81.14,60.113 81.213,60.186 81.213,61.803 P5.D6@82.27,62.86
ETH_RX_4_P: P5.D3 Q18.11 | length 13.3
  Bottom Layer w0.125: Q18.11@77.407,64.905 77.877,64.905 78.523,65.551 78.523,65.898 78.597,65.971 78.701,65.971 79.796,64.876 79.796,60.83 80.765,59.86 81.329,59.86 82.139,59.05 P5.D3@84.81,59.05
ETH_RX_5_N: P2.6 Q4.9 | length 13.1
  Top Layer w0.125: P2.6@7.32,62.53 8.262,61.588 8.262,60.173 8.336,60.1 10.443,60.1 13.644,63.301 15.384,63.301 15.457,63.375 15.457,63.779 16.123,64.445 Q4.9@16.593,64.445
ETH_RX_5_P: P2.3 Q4.11 | length 13.3
  Top Layer w0.125: P2.3@5.54,59.47 7.914,59.47 8.291,59.847 10.547,59.847 13.749,63.049 15.393,63.049 15.467,62.975 15.467,62.561 16.123,61.905 Q4.11@16.593,61.905
ETH_TX_1_N: P5.A2 Q5.14 | length 8.3
  Bottom Layer w0.125: Q5.14@77.407,15.095 77.877,15.095 78.518,14.454 78.518,14.025 78.591,13.951 82.341,13.951 83.213,14.823 83.213,14.927 P5.A2@82.27,15.87
ETH_TX_1_P: P5.A1 Q5.16 | length 8.5
  Bottom Layer w0.125: Q5.16@77.407,12.555 77.877,12.555 78.514,13.192 78.514,13.625 78.588,13.699 82.445,13.699 83.391,14.645 84.765,14.645 P5.A1@84.81,14.6
ETH_TX_2_N: P5.B2 Q6.14 | length 8.1
  Bottom Layer w0.125: Q6.14@77.407,30.095 77.877,30.095 78.512,29.459 78.512,29.025 78.586,28.951 80.707,28.951 80.939,28.72 83.139,28.72 83.213,28.793 83.213,28.897 P5.B2@82.27,29.84
ETH_TX_2_P: P5.B1 Q6.16 | length 8.3
  Bottom Layer w0.125: Q6.16@77.407,27.555 77.877,27.555 78.512,28.191 78.512,28.625 78.586,28.699 80.603,28.699 80.834,28.467 83.244,28.467 83.391,28.615 84.765,28.615 P5.B1@84.81,28.57
ETH_TX_3_N: P5.C2 Q17.14 | length 8.9
  Bottom Layer w0.125: Q17.14@77.407,46.095 77.877,46.095 78.509,45.462 78.509,45.025 78.583,44.951 79.749,44.951 82.01,42.69 83.139,42.69 83.213,42.763 83.213,42.867 P5.C2@82.27,43.81
ETH_TX_3_P: P5.C1 Q17.16 | length 9.1
  Bottom Layer w0.125: Q17.16@77.407,43.555 77.877,43.555 78.509,44.188 78.509,44.625 78.583,44.699 79.644,44.699 81.906,42.437 83.244,42.437 83.391,42.585 84.765,42.585 P5.C1@84.81,42.54
ETH_TX_4_N: P5.D2 Q18.14 | length 9.4
  Bottom Layer w0.125: Q18.14@77.407,61.095 77.877,61.095 78.526,60.446 78.526,60.025 78.599,59.951 78.845,59.951 82.136,56.66 83.139,56.66 83.213,56.733 83.213,56.837 P5.D2@82.27,57.78
ETH_TX_4_P: P5.D1 Q18.16 | length 9.6
  Bottom Layer w0.125: Q18.16@77.407,58.555 77.877,58.555 78.514,59.192 78.514,59.625 78.587,59.699 78.74,59.699 82.032,56.407 83.244,56.407 83.391,56.555 84.765,56.555 P5.D1@84.81,56.51
ETH_TX_5_N: P2.2 Q4.14 | length 14
  Top Layer w0.125: P2.2@7.32,58.45 6.973,58.45 6.609,58.087 6.59,58.087 6.502,57.998 6.502,56.643 6.575,56.569 9.009,56.569 10.208,57.768 13.227,57.768 14.045,56.951 15.41,56.951 15.483,57.025 15.483,57.455 16.123,58.095 Q4.14@16.593,58.095
ETH_TX_5_P: P2.1 Q4.16 | length 13.2
  Top Layer w0.125: P2.1@5.54,57.43 6.249,56.721 6.249,56.538 6.471,56.317 9.114,56.317 10.313,57.516 13.123,57.516 13.94,56.699 15.415,56.699 15.489,56.625 15.489,56.19 16.123,55.555 Q4.16@16.593,55.555
GND: C2.1 C3.1 C4.1 C5.1 C7.1 C8.1 C9.1 C10.1 C11.1 C12.1 C13.1 C14.1 C15.1 C16.1 C17.1 C18.1 C19.1 C20.1 C21.1 C22.1 C23.1 C24.1 C25.1 C26.1 C27.1 C28.1 C29.1 C30.1 C31.1 C32.1 C34.1 C35.1 C36.1 C37.1 C38.1 C39.1 C40.1 C41.1 C42.1 C43.1 C44.1 C45.1 C46.1 C47.1 C48.1 C49.1 C50.1 C51.1 C52.1 C53.1 C54.1 C55.1 C56.1 C57.1 C58.1 C59.1 C60.1 C61.1 C62.1 C63.1 C64.1 C65.1 C66.1 C67.1 C68.2 C69.1 C70.1 C71.1 C72.1 C74.2 C75.2 C76.1 C77.1 C79.2 C81.1 C83.1 C84.2 C85.1 D3.3 D4.2 D5.1 DZ2.2 DZ3.1 J16.1 J17.1 J18.1 J19.1 LED1.1 LED12.1 LED13.1 LED14.1 LED15.1 LED16.1 LED17.1 P1.4 P1.6 P1.8 P1.10 P1.12 P2.7 P2.8 P3.6 P3.8 P4.1 P5.A7 P5.A8 P5.B7 P5.B8 P5.C7 P5.C8 P5.D7 P5.D8 P5.Shield P6.1 P6.2 P7.5 P7.S1 P7.S2 P7.S3 P7.S4 P7.S5 P7.S6 P8.N P9.4 P11.4 P11.6 P11.8 P11.10 P11.12 Q9.2 Q10.2 Q12.2 Q15.2 Q16.2 R6.1 R7.1 R9.1 R10.1 R11.1 R12.1 R13.1 R14.1 R15.1 R16.1 R17.1 R18.1 R19.1 R20.1 R21.1 R26.1 R40.1 R41.1 R50.1 R54.1 R61.1 R62.1 R66.1 R73.1 R74.1 SW1.3 SW2.3 T3.2 U1.2 U2.46 U2.47 U2.69 U2.75 U2.77 U2.80 U2.107 U2.109 U2.123 U2.EPAD U3.2 U4.1 U5.6 U5.9 U6.2 U7.57 X1.2 X1.4 X2.2 X2.4 | length 114.3
  Top Layer w0.2: v1@32.25,64.95 P1.10@32.25,65.78 ; v1@34.25,64.95 P1.6@34.25,65.78 ; v1(75.9,13.1) LED12.1@77.25,13.1 ; v1(75.9,28.1) LED13.1@77.25,28.1 ; v1(75.9,44.1) LED15.1@77.25,44.1 ; v1(75.9,59.1) LED16.1@77.25,59.1
  Top Layer w0.4: v1(47.8,71.6) 47.408,71.992 47.408,73.308 48.7,74.6 P7.5@48.7,75.325
  Top Layer w0.5: R21.1@13.95,51.5 v1(14.6,51.5) ; LED14.1@15.8,76.75 v1(15.8,78.3) ; Q12.2@16.185,71.95 16.235,71.9 17.95,71.9 R66.1@18,71.85 ; v1(17.6,9.8) 18.15,9.8 D3.3@18.2,9.85 ; D3.3@18.2,9.915 D3.3@18.2,9.85 ; v1(18.8,9.8) 18.25,9.8 D3.3@18.2,9.85 ; U6.2@20.464,5.365 v1(22.035,5.365) 22.3,5.1 22.95,5.1 C85.1@23,5.15 C34.1@25,5.15 ; v1(26.75,20.35) LED1.1@26.75,21 ; R50.1@26.9,15 v1(27.7,15) U1.2@28.65,15 v1(29.6,15) ; v1(28,41.5) R6.1@28,42.15 ; v1(28,54.5) C5.1@28,55.15 ; v1(28,60.5) C4.1@28,61.15 ; DZ3.1@30,37.43 v1(30,38.3) ; R7.1@30,43.85 v1(30,44.5) ; C3.1@31.05,23.455 v1(31.7,23.455) ; C19.1@37.5,55.8 37.5,56.95 R12.1@37.55,57 ; v1(37.5,59) 37.5,58.45 R11.1@37.55,58.4 ; v1(39.175,52.1) 39.175,52.525 R18.1@39.25,52.6 ; SW2.3@40.6,78.2 v1(41.1,78.2) ; SW1.3@40.625,72.25 40.675,72.2 v1(41.2,72.2) ; R10.1@40.7,62.35 40.75,62.3 42.15,62.3 R9.1@42.2,62.35 C17.1@43.6,62.35 43.65,62.3 v1(44.2,62.3) 44.75,62.3 C18.1@44.8,62.35 ; v1(41.3,15) C81.1@41.95,15 ; C81.1@42,15.4 42,16.342 42.299,16.641 46.294,16.641 U5.6@46.3,16.635 48.05,16.635 48.1,16.685 U5.9@48.1,16.7 ; C76.1@44,26.15 v1(44,26.8) ; C76.1@44.086,26.135 v1(44.736,26.135) ; v1(44.6,37.9) C20.1@44.6,38.55 ; v1(47.8,71.6) D4.2@48.65,71.6 ; v1(48.164,25.865) C74.2@48.6,25.865 ; C74.2@48.6,25.7 49.6,26.7 U3.2@50.45,26.7 ; v1(48.9,25.2) C74.2@48.9,25.85 ; v1(50.3,29.6) C75.2@50.95,29.6 ; C75.2@50.965,29.686 v1(50.965,30.336) ; C51.1@55.15,76.5 55.2,76.55 C50.1@55.2,77.9 ; C50.1@55.15,77.9 55.2,77.95 v1(55.2,78.7) ; v1(55.2,75.8) C51.1@55.2,76.5 ; R54.1@55.85,20 v1(56.5,20) ; v1(57.3,13) C83.1@57.95,13 ; v1(57.6,18) LED17.1@58.25,18 ; X2.4@57.7,37.6 57.7,38.426 C35.1@57.7,38.6 ; C83.1@58,13.3 v1(58,13.95) ; C44.1@58.7,35.5 X2.2@58.7,36.5 ; v1(59.5,65.7) C49.1@59.5,66.35 ; v1(59.9,39.1) R26.1@59.9,39.75 ; C43.1@60.9,66.7 X1.4@61.9,66.7 ; X1.2@63.1,67.7 63.436,67.7 63.45,67.686 v1(63.7,67.686) ; v1@63.7,67.7 C42.1@64.2,67.7 ; C48.1@64.35,79.2 v1(64.9,79.2) ; v1(65.9,14) C67.1@67.15,14 ; v1(65.9,20) C66.1@67.15,20 ; v1(65.9,29) C65.1@67.15,29 ; v1(65.9,35) C64.1@67.15,35 ; v1(65.9,45) C72.1@67.15,45 ; v1(65.9,51) C71.1@67.15,51 ; v1(65.9,60) C70.1@67.15,60 ; v1(66.3,66.8) 67.1,66 C69.1@67.15,66 ; v1(73.5,14.5) R13.1@74.15,14.5 ; v1(73.5,19.5) R14.1@74.15,19.5 ; v1(73.5,34.5) R16.1@74.15,34.5 ; v1(73.5,50.5) R17.1@74.15,50.5 ; v1(73.5,60.5) R20.1@74.15,60.5 ; v1(73.5,65.5) R19.1@74.15,65.5 ; v1(73.572,29.5) R15.1@74.15,29.5 ; v1(78.9,73.5) 78.905,73.505 P9.4@78.905,75 ; R40.1@83,72.15 83.05,72.2 v1(83.6,72.2) ; R41.1@87,72.15 87.05,72.2 v1(87.6,72.2)
  Bottom Layer w0.5: v1(37.1,40.5) 37.1,40.05 C29.1@37.15,40 ; v1(38.7,47.4) C63.1@38.7,48.05 ; C32.1@38.7,52.15 38.75,52.1 v1(39.175,52.1) ; v1(40.2,74.7) C41.1@40.75,74.7 ; v1(40.248,68.712) 40.838,68.712 C40.1@40.95,68.6 ; C14.1@43.45,47.3 v1(44.1,47.3) ; C62.1@43.45,48.6 v1(44.1,48.6) ; C31.1@43.45,49.9 v1(44.1,49.9) ; C30.1@43.45,52.5 v1(44.1,52.5) ; C61.1@43.45,53.9 v1(44.1,53.9) ; C11.1@43.45,55.2 v1(44.1,55.2) ; C10.1@43.45,56.5 v1(44.1,56.5) ; C15.1@46.35,39.5 46.4,39.55 v1(46.4,40) ; C12.1@46.6,43.85 v1(46.6,44.5) ; v1(47,56.2) C9.1@47,56.85 ; C13.1@48.1,43.85 v1(48.1,44.5) ; v1(49.2,39.5) C59.1@50.55,39.5 ; C23.1@49.4,43.85 v1(49.4,44.5) ; C56.1@50.7,43.85 v1(50.7,44.5) ; v1(51,56.2) C8.1@51,56.85 ; C57.1@52.2,43.85 v1(52.2,44.5) ; v1(52.2,56.2) C24.1@52.2,56.85 ; C22.1@53.5,43.85 v1(53.5,44.5) ; v1(53.6,56.2) C55.1@53.6,56.85 ; v1(54,39.5) C28.1@54.65,39.5 ; C58.1@54.8,43.85 v1(54.8,44.5) ; v1(55,56.2) C54.1@55,56.85 ; v1(56,45) C60.1@56.6,45 ; v1(56,46.9) C27.1@56.65,46.9 ; v1(56,48.28) C16.1@56.65,48.28 ; v1(56,49.56) C45.1@56.65,49.56 ; v1(56,51.04) C52.1@56.65,51.04 ; v1(56,52.32) C26.1@56.65,52.32 ; v1(56,53.5) C7.1@56.65,53.5 ; v1(56,55.8) C53.1@56.65,55.8 ; C21.1@56.2,43.95 56.2,44 56.6,44.4 C60.1@56.6,44.9 ; v1(95.2,18.5) 95.185,18.515 Q9.2@95.185,19.05 95.235,19.1 96.95,19.1 R61.1@97,19.15 ; v1(95.2,32.5) 95.185,32.515 Q10.2@95.185,33.05 95.235,33.1 96.95,33.1 R62.1@97,33.15 ; v1(95.2,46.5) 95.185,46.515 Q15.2@95.185,47.05 95.235,47.1 96.95,47.1 R73.1@97,47.15 ; v1(95.2,57.5) 95.185,57.515 Q16.2@95.185,58.05 95.235,58.1 96.95,58.1 R74.1@97,58.15
  other v1: 36.8,1.6 39.2,1.6 60.8,1.6 63.2,1.6 36.8,2.6 39.2,2.6 60.8,2.6 63.2,2.6 36.8,3.6 39.2,3.6 60.8,3.6 63.2,3.6 24,5.15 48.5,12.8 49.5,12.8 48.5,13.8 49.5,13.8 64.6,16 66.2,16 45.273,16.641 33.9,16.9 64.6,17.2 66.2,17.2 48.5,18.2 49.5,18.2 48.5,19.2 49.5,19.2 64.6,21.351 65.8,21.351 36.6,21.6 36.6,22.6 65.8,22.9 64.6,22.951 36.6,23.6 36.6,24.6 64.9,29.9 64.1,30.7 66.2,31.2 65.4,32 58.7,36 65.9,36.5 65.1,37.3 67.1,37.7 57.7,38.2 66.3,38.5 65.561,47.5 67.161,47.5 65.561,48.7 67.161,48.7 63.4,53.574 64.6,53.574 63.4,55.174 64.6,55.174 37.5,56.3 63.4,60.861 64.6,60.861 41.4,62.3 63.4,62.461 64.6,62.461 63.4,63.186 64.6,63.186 63.4,64.786 64.6,64.786 32.253,65.003 34.253,65.003 61.4,66.7 69.3,69.2 69.3,70.7 72.3,70.7 17.092,71.9 72.3,72.2 60.3,75.6 55.2,77.2
GND_CH: C6.2 P2.SH1 P2.SH2 | length 20.1
  Bottom Layer w0.5: P2.SH2@6.43,52.875 6.731,53.176 6.731,54.331 11.3,58.9 C6.2@11.3,60 11.3,62.626 6.5,67.426 P2.SH1@6.5,69
GND_RJ45: C68.1 R33.1 R34.1 R35.1 R36.1 R45.1 R46.1 R47.1 R48.1 | length 62.7
  Top Layer w0.8: R33.1@78.8,11 79.531,11 80,11.469 80,20.031 ; R34.1@78.85,20.5 79.531,20.5 80,20.031 ; R46.1@78.85,51.5 R47.1@78.85,57 79.531,57 80,57.469 80,65.831 79.531,66.3 79.331,66.5 R48.1@78.85,66.5 ; R46.1@78.9,51.5 79.099,51.5 79.109,51.49 79.51,51.49 80,51 80,42.469 79.531,42 R45.1@78.85,42 78.85,40.75 78.8,40.7 78.8,40.1 C68.1@78.7,40 78.7,39.6 78.85,39.45 R36.1@78.85,35.5 78.9,35.5 80,34.4 80,27.7 78.9,26.6 78.9,26 R35.1@78.85,26 78.85,24.35 80,23.2 80,20.031
GND_RJ45_2: C6.1 R2.1 R3.1 | length 6.3
  Bottom Layer w0.5: R2.1@14.35,56.8 R3.1@14.35,63.1
IO0: C41.2 R39.1 SW2.1 U7.5 | length 36.3
  Top Layer w0.2: v1(42.7,77.4) SW2.1@42.7,78.2 ; U7.5@65.445,73 65.455,73.01 65.872,73.01 66.5,73.638 v1(66.5,73.9)
  Bottom Layer w0.2: C41.2@42.6,74.6 43.6,73.6 51,73.6 52.088,72.512 55.328,72.512 55.816,73 60.2,73 65.136,77.936 66.193,77.936 66.5,77.63 v1(66.5,73.9) ; C41.2@42.6,74.85 C41.2@42.45,74.7 R39.1@42.45,76.7 42.7,76.95 v1(42.7,77.4)
NetC1_1: C1.1 U1.1 | length 4
  Top Layer w0.3: C1.1@25.15,17 25.2,17 26.25,15.95 U1.1@28.65,15.95 U1.1@28.7,15.9
NetC1_2: C1.2 DZ2.1 L1.1 U1.6 | length 4.9
  Top Layer w0.3: C1.2@26.85,17 30.05,17 31.05,16 U1.6@31.3,16
NetC2_2: C2.2 P10.2 U1.5 | length 14.5
  Top Layer w0.6: U1.5@31.35,15 32.7,15 C2.2@33.7,14
  Top Layer w1: P10.2@29,6 32,6 34,8 C2.2@34,13.9
NetC4_2: C4.2 Q4.7 | length 2.7
  Top Layer w0.2: Q4.7@25.407,63.175 Q4.7@25.432,63.15
  Top Layer w0.5: Q4.7@25.432,63.15 v1(26.5,63.15) 27.557,63.15 27.657,63.05 27.85,63.05 C4.2@28,62.9
NetC5_2: C5.2 Q4.2 | length 2.5
  Top Layer w0.2: Q4.2@25.407,56.825 Q4.2@25.432,56.8
  Top Layer w0.5: Q4.2@25.432,56.8 v1(26.5,56.8) C5.2@27.9,56.8
NetC35_2: C35.2 U2.126 X2.3 | length 7.9
  Top Layer w0.2: U2.126@55.406,42.616 55.406,41.672 55.6,41.478 55.6,39.7 55.954,39.346 58.496,39.346 58.693,39.149 C35.2@58.693,38.624
  Top Layer w0.5: C35.2@58.7,38.6 58.7,37.7 X2.3@58.8,37.6
NetC36_2: C36.2 L4.1 U7.2 U7.3 | length 0.2
  Top Layer w0.5: C36.2@67.5,71.5 C36.2@67.65,71.65
NetC42_2: C42.2 T1.1 X1.1 | length 2.1
  Top Layer w0.5: X1.1@63,66.6 63.1,66.7 C42.2@64.2,66.7 T1.1@65.1,66.7
NetC43_2: C43.2 U7.53 X1.3 | length 4.3
  Top Layer w0.2: X1.3@62,68 62.05,68 62.3,68.25 62.3,68.3 63.4,69.4 U7.53@63.4,70.555
  Top Layer w0.5: C43.2@61,67.7 61.85,67.7 62,67.85 X1.3@62,67.9
NetC44_2: C44.2 R25.2 X2.1 | length 2.2
  Top Layer w0.5: R25.2@56.3,36.6 X2.1@57.6,36.6 ; C44.2@57.7,35.5 X2.1@57.7,36.4
NetC64_2: C64.2 Q6.7 | length 2.3
  Top Layer w0.5: C64.2@68.85,35 69,35.15 69.75,35.15 v1(69.8,35.2)
  Bottom Layer w0.5: Q6.7@68.593,35.175 69.775,35.175 v1(69.8,35.2)
NetC65_2: C65.2 Q6.2 | length 2.2
  Top Layer w0.5: C65.2@68.85,29 69,28.85 v1(69.8,28.85)
  Bottom Layer w0.5: Q6.2@68.593,28.825 69.775,28.825 v1(69.8,28.85)
NetC66_2: C66.2 Q5.7 | length 2.3
  Top Layer w0.5: C66.2@68.85,20 69,20.15 69.75,20.15 v1(69.8,20.2)
  Bottom Layer w0.5: Q5.7@68.593,20.175 69.775,20.175 v1(69.8,20.2)
NetC67_2: C67.2 Q5.2 | length 2.2
  Top Layer w0.5: C67.2@68.85,14 69,13.85 v1(69.8,13.85)
  Bottom Layer w0.5: Q5.2@68.593,13.825 69.775,13.825 v1(69.8,13.85)
NetC69_2: C69.2 Q18.7 | length 2.3
  Top Layer w0.5: C69.2@68.85,66 69,66.15 69.75,66.15 v1(69.8,66.2)
  Bottom Layer w0.5: Q18.7@68.593,66.175 69.775,66.175 v1(69.8,66.2)
NetC70_2: C70.2 Q18.2 | length 2.2
  Top Layer w0.5: C70.2@68.85,60 69,59.85 v1(69.8,59.85)
  Bottom Layer w0.5: Q18.2@68.593,59.825 69.775,59.825 v1(69.8,59.85)
NetC71_2: C71.2 Q17.7 | length 2.3
  Top Layer w0.5: C71.2@68.85,51 69,51.15 69.75,51.15 v1(69.8,51.2)
  Bottom Layer w0.5: Q17.7@68.593,51.175 69.775,51.175 v1(69.8,51.2)
NetC72_2: C72.2 Q17.2 | length 2.2
  Top Layer w0.5: C72.2@68.85,45 69,44.85 v1(69.8,44.85)
  Bottom Layer w0.5: Q17.2@68.593,44.825 69.775,44.825 v1(69.8,44.85)
NetC78_1: C78.1 D5.2 L8.1 U5.8 | length 10.6
  Top Layer w0.2: 46.9,11.6 54.6,11.6 55.85,12.85 C78.1@55.85,14
  other v1: 44.5,9.7 45.5,9.7
NetC78_2: C78.2 U5.1 | length 2.7
  Top Layer w0.2: U5.1@51.7,14.095 53.305,14.095 53.4,14 C78.2@54.15,14 54.2,14 C78.2@54.3,13.9
NetC82_1: C82.1 R53.1 R54.2 U5.4 | length 6.3
  Top Layer w0.2: U5.4@51.7,17.905 53.305,17.905 53.4,18 54,18 C82.1@54.1,17.9 ; R53.1@54.15,16 54.2,16.05 C82.1@54.2,17.9 ; R54.2@54.15,20 54.15,18.15 C82.1@54.2,18.1
NetD2_2: D2.2 J14.1 | length 1.7
  Top Layer w0.2: J14.1@35.905,38.914 36.051,38.768 36.632,38.768 v1(36.9,38.5)
  Bottom Layer w0.2: v1(36.9,38.5) D2.2@37.438,38.5
NetDZ1_1: DZ1.1 Q1.4 R6.2 | length 8.5
  Top Layer w0.2: DZ1.1@26,44.575 26.025,44.575 26.743,43.857 26.943,43.857 v1(27,43.8) 27.95,43.8 R6.2@28,43.85
  Top Layer w0.381: v1(21.6,44.6) 21.632,44.6 21.663,44.569 22.006,44.569 Q1.4@22.025,44.549
  Bottom Layer w0.2: v1(21.6,44.6) 26.2,44.6 v1(27,43.8)
NetDZ1_2: DZ1.2 Q1.5 Q1.6 Q1.7 Q1.8 Q2.1 Q2.2 Q2.3 Q3.2 R1.2 | length 9.3
  Top Layer w0.2: Q2.1@23.975,38.549 24.024,38.5 25,38.5 27.467,36.033 27.75,36.033 27.95,35.833 Q3.2@27.95,35.815 27.95,34.1 R1.2@27.85,34
  Top Layer w0.5: 23.7,41.3 23.825,41.425 DZ1.2@26,41.425
NetDZ3_2: DZ3.2 Q3.1 R1.1 | length 8
  Top Layer w0.2: Q3.1@26.05,35.815 26.05,34.1 R1.1@26.15,34 26.15,33.25 26.5,32.9 29.6,32.9 30,33.3 DZ3.2@30,34.57
NetJ1_1: J1.1 U2.60 | length 9.5
  Top Layer w0.2: J1.1@44,67 44,64.6 45.55,63.05 45.55,59.572 45.4,59.422 U2.60@45.4,58.179
NetJ2_1: J2.1 U2.59 | length 8.2
  Top Layer w0.2: J2.1@45,66 45,64.5 45.875,63.625 45.875,59.438 45.8,59.363 U2.59@45.8,58.179
NetJ3_1: J3.1 U2.58 | length 8.9
  Top Layer w0.2: J3.1@46,67 46,65.833 46.2,65.633 U2.58@46.2,58.179
NetJ4_1: J4.1 U2.57 | length 8
  Top Layer w0.2: U2.57@46.6,58.179 46.6,64.5 46.9,64.8 46.9,65.9 J4.1@47,66
NetJ5_1: J5.1 U2.55 | length 9.1
  Top Layer w0.2: U2.55@47.4,58.179 47.414,58.193 47.414,59.168 47.55,59.303 47.55,59.697 47.55,64.55 48,65 J5.1@48,67
NetJ6_1: J6.1 U2.54 | length 8.5
  Top Layer w0.2: U2.54@47.8,58.179 47.814,58.193 47.814,59.108 47.875,59.169 47.875,59.831 47.875,63.375 49,64.5 J6.1@49,66 ; J6.1@48.9,66.1 J6.1@49,66.2
NetJ7_1: J7.1 U2.53 | length 9.6
  Top Layer w0.2: U2.53@48.2,58.179 48.2,62.682 50,64.482 J7.1@50,67
NetJ8_1: J8.1 U2.52 | length 8.9
  Top Layer w0.2: U2.52@48.6,58.179 48.6,61.9 51,64.3 51,65.8 50.9,65.9 J8.1@51,66
NetJ9_1: J9.1 U2.51 | length 10.1
  Top Layer w0.2: U2.51@49,58.179 49,61.5 52,64.5 J9.1@52,67
NetJ10_1: J10.1 U2.50 | length 9.3
  Top Layer w0.2: U2.50@49.4,58.179 49.4,61 52.9,64.5 52.9,65.9 J10.1@53,66
NetJ11_1: J11.1 U2.49 | length 10.6
  Top Layer w0.2: U2.49@49.8,58.179 49.8,60.497 54,64.697 J11.1@54,67
NetJ12_1: J12.1 U2.48 | length 9.8
  Top Layer w0.2: U2.48@50.2,58.179 50.2,60.1 55,64.9 J12.1@55,66
NetJ13_1: J13.1 R22.1 U2.93 | length 7.2
  Top Layer w0.2: J13.1@37,45.7 39,45.7 39.3,45.4 ; R22.1@38.8,43.8 38.8,44.9 39.3,45.4 ; U2.93@42.221,45.4 39.3,45.4
NetJ15_1: J15.1 U2.90 | length 5.7
  Top Layer w0.2: J15.1@37,47.4 37.813,47.4 38.813,46.4 40.8,46.4 41,46.6 U2.90@42.221,46.6
NetJ23_1: J23.1 U7.24 | length 1.7
  Top Layer w0.2: U7.24@61,77.445 61,78.4 J23.1@61.5,78.9
NetL7_2: L7.2 Q1.1 Q1.2 Q1.3
NetLED1_2: LED1.2 R4.1 | length 2
  Top Layer w0.6: R4.1@25.15,19.055 25.2,19.105 25.2,20.9 LED1.2@25.3,21
NetLED2_2: LED2.2 R27.1 | length 1.4
  Top Layer w0.8: R27.1@75.85,18 LED2.2@77.25,18
NetLED3_2: LED3.2 R28.1 | length 1.4
  Top Layer w0.8: R28.1@75.85,16 LED3.2@77.25,16
NetLED4_2: LED4.2 R29.1 | length 1.4
  Top Layer w0.8: R29.1@75.85,33 LED4.2@77.25,33
NetLED5_1: LED5.1 R40.2 | length 2.3
  Top Layer w0.2: R40.2@83,73.85 83,76 LED5.1@83.1,76.1
NetLED5_2: LED5.2 U7.10 | length 20.6
  Top Layer w0.2: U7.10@65.445,75 70.229,75 70.529,74.7 v1(70.6,74.7) ; LED5.2@83,77.75 v1(83,78.9)
  Bottom Layer w0.2: v1(70.6,74.7) 78.8,74.7 v1(83,78.9)
NetLED6_1: LED6.1 R41.2 | length 2.4
  Top Layer w0.2: R41.2@87,73.85 LED6.1@87,76.2
NetLED6_2: LED6.2 U7.9 | length 24.9
  Top Layer w0.2: U7.9@65.445,74.6 69.5,74.6 v1(70,74.1) ; LED6.2@87,77.75 v1(87,78.9)
  Bottom Layer w0.2: v1(70,74.1) 82.2,74.1 v1(87,78.9)
NetLED7_2: LED7.2 R32.1 | length 1.4
  Top Layer w0.8: R32.1@75.85,31 LED7.2@77.25,31
NetLED8_2: LED8.2 R37.1 | length 1.4
  Top Layer w0.8: R37.1@75.85,49 LED8.2@77.25,49
NetLED9_2: LED9.2 R42.1 | length 1.4
  Top Layer w0.8: R42.1@75.85,47 LED9.2@77.25,47
NetLED10_2: LED10.2 R43.1 | length 1.4
  Top Layer w0.8: R43.1@75.85,62 LED10.2@77.25,62
NetLED11_2: LED11.2 R44.1 | length 1.4
  Top Layer w0.8: R44.1@75.85,64 LED11.2@77.25,64
NetLED12_2: LED12.2 R59.1 | length 21.5
  Top Layer w0.2: v1@75.8,12 v1(75.9,12) 78.4,12 78.75,12.35 LED12.2@78.75,13.1
  Bottom Layer w0.2: v1(75.9,12) 76.6,11.3 87.231,11.3 88.1,12.169 88.1,16.95 R59.1@88.15,17
NetLED13_2: LED13.2 R60.1 | length 20.5
  Top Layer w0.2: v1@75.8,27 v1(75.9,27) 78.4,27 78.75,27.35 LED13.2@78.75,28.1
  Bottom Layer w0.2: v1(75.9,27) 76.4,26.5 78.9,26.5 80.1,27.7 82.7,27.7 83.3,27.1 87.4,27.1 88.2,27.9 88.2,30.95 R60.1@88.15,31
NetLED14_2: LED14.2 R65.1 | length 1.2
  Top Layer w0.2: LED14.2@15.8,75.25 15.825,75.225 16.925,75.225 R65.1@17,75.15
NetLED15_2: LED15.2 R71.1 | length 21.2
  Top Layer w0.2: v1@75.8,43 v1(75.9,43) 78.4,43 78.75,43.35 LED15.2@78.75,44.1
  Bottom Layer w0.2: v1(75.9,43) 77.1,41.8 82.8,41.8 84,40.6 87.7,40.6 88.15,41.05 R71.1@88.15,45
NetLED16_2: LED16.2 R72.1 | length 17.6
  Top Layer w0.2: v1@75.8,58 v1(75.9,58) 78.4,58 78.75,58.35 LED16.2@78.75,59.1
  Bottom Layer w0.2: v1(75.9,58) 78.264,55.636 82.464,55.636 82.9,55.2 87.35,55.2 87.8,55.65 87.8,55.7 88.1,56 R72.1@88.15,56
NetLED17_2: LED17.2 R75.1 | length 2.1
  Top Layer w0.2: LED17.2@59.75,18 59.75,19.05 59.8,19.1 59.8,19.9 R75.1@59.9,20
NetP2_10: P2.10 R5.2 | length 2.6
  Bottom Layer w0.2: R5.2@9.9,55.65 11.36,55.65 P2.10@12.14,56.43
NetP2_12: P2.12 R8.2 | length 2.3
  Bottom Layer w0.5: R8.2@9.8,67.85 9.805,67.855 12.135,67.855 P2.12@12.14,67.86
NetQ2_4: Q2.4 Q3.3 R7.2 | length 10.3
  Top Layer w0.2: Q3.3@27.2,38.61 27.21,38.61 30,41.4 R7.2@30,42.15
  Top Layer w0.381: v1(21.6,38.6) 21.632,38.6 21.663,38.569 22.006,38.569 Q2.4@22.025,38.549
  Bottom Layer w0.381: v1(21.6,38.6) 26.301,38.6 26.502,38.399 26.607,38.399 v1(26.63,38.376)
NetQ4_10: Q4.10 R3.2 | length 2.8
  Top Layer w0.2: Q4.10@16.593,63.175 Q4.10@16.618,63.15
  Top Layer w0.5: Q4.10@16.618,63.15 v1(17.686,63.15)
  Bottom Layer w0.5: R3.2@16.05,63.2 16.1,63.15 v1(17.686,63.15)
NetQ4_15: Q4.15 R2.2 | length 2.7
  Top Layer w0.2: Q4.15@16.593,56.825 Q4.15@16.618,56.8
  Top Layer w0.5: Q4.15@16.618,56.8 v1(17.686,56.8)
  Bottom Layer w0.5: R2.2@16.05,56.8 v1(17.686,56.8)
NetQ5_10: Q5.10 R34.2 | length 3.3
  Top Layer w0.5: v1(76,21) 76.35,20.65 77,20.65 R34.2@77.15,20.5
  Bottom Layer w0.5: v1(76,21) 76,20.696 76.39,20.306 77.251,20.306 Q5.10@77.407,20.15
NetQ5_15: Q5.15 R33.2 | length 7
  Top Layer w0.5: v1(75.9,11) R33.2@77.15,11
  Bottom Layer w0.5: v1(75.9,11) 75.353,11 75,11.353 75,13.532 75.293,13.825 Q5.15@77.407,13.825